# Altium PCB SensorNode.PcbDoc
Units mm, origin at the board's own origin, x right, y up, seen from the top; angles counter-clockwise.
Board outline 22.23 x 45.4 mm, 2 copper layers (Top Layer, Bottom Layer); 17 components, 15 nets, 98 pads, 6 vias.
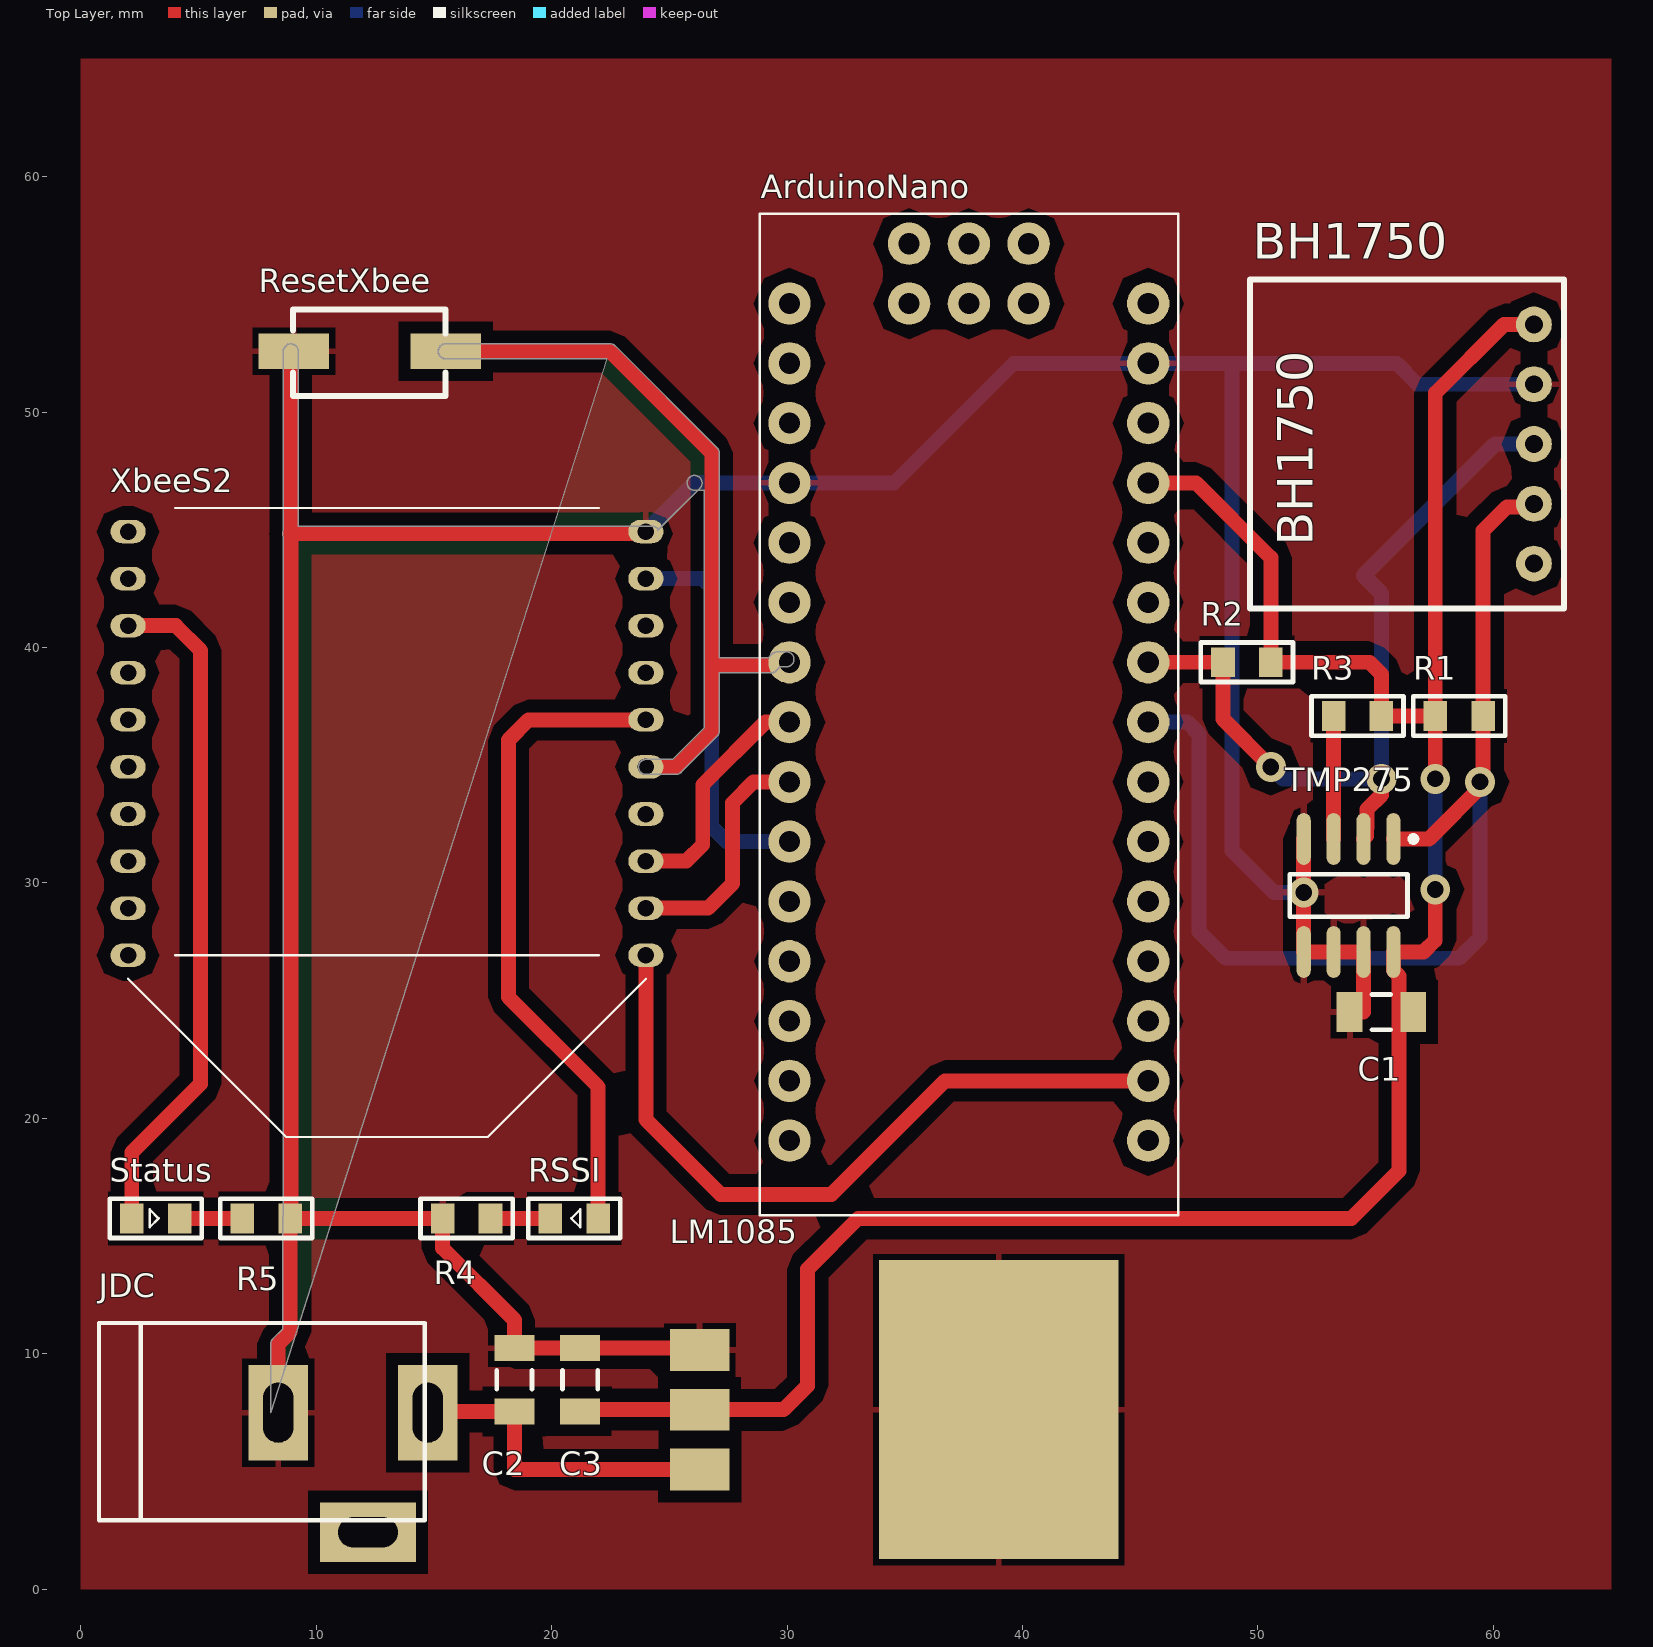
[diagram p0: Top Layer view]
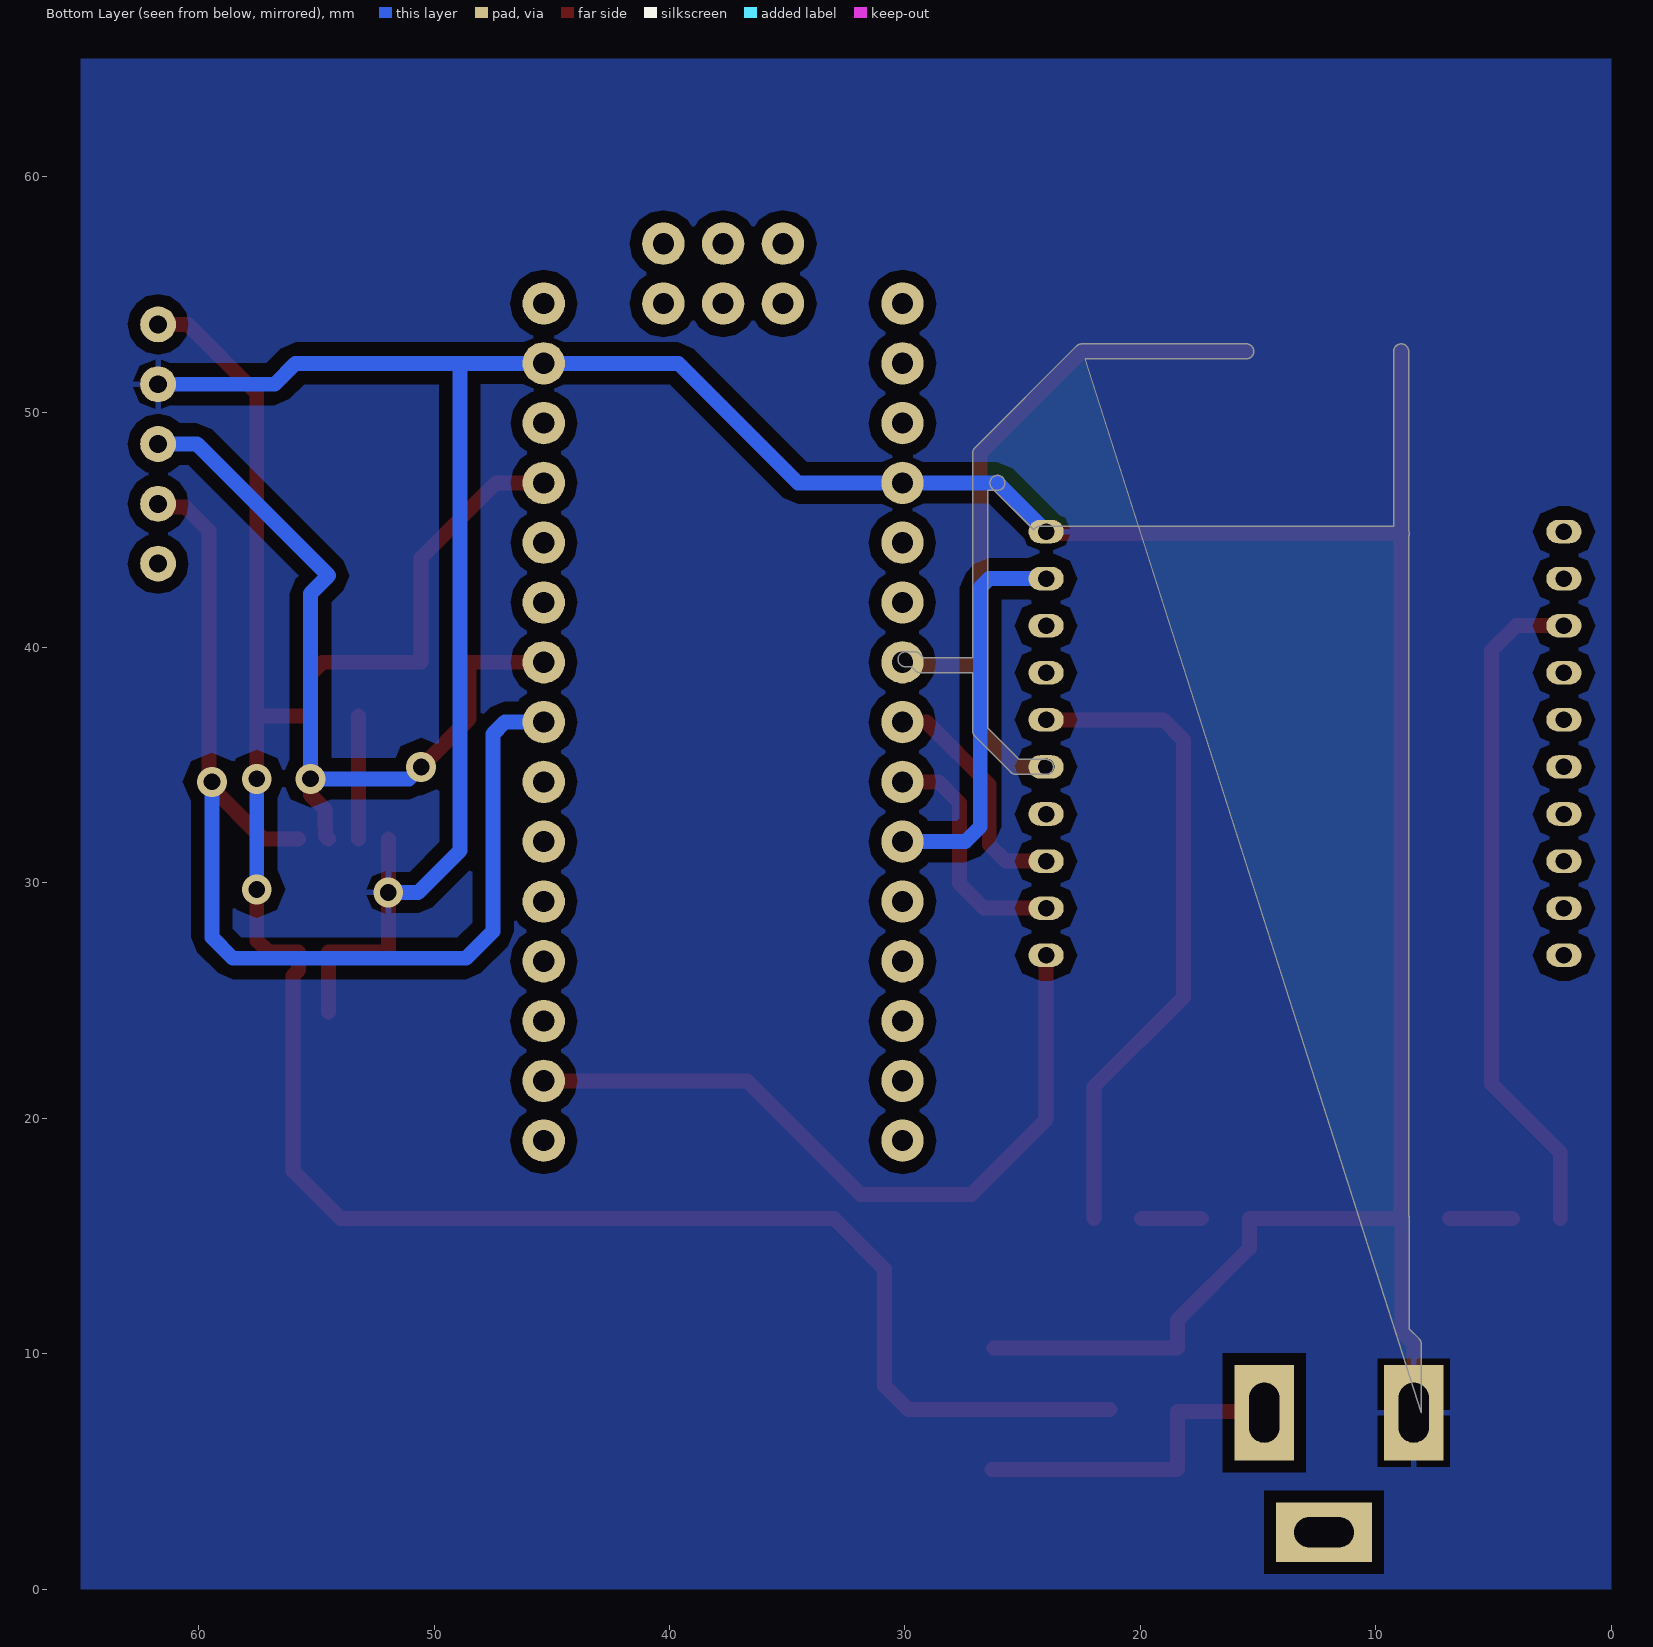
[diagram p1: Bottom Layer view, seen from below]

## Layer stack, top to bottom
Top Solder: solder mask 0.0102, Solder Resist, Dk 3.5
Top Layer: signal copper 0.0356
Dielectric 1: dielectric 0.32, FR-4, Dk 4.8
Bottom Layer: signal copper 0.0356
Bottom Solder: solder mask 0.0102, Solder Resist, Dk 3.5

## Board outline
8.064,7.493 8.064,10.414 cw(c8.382,10.414) 8.158,10.639 8.157,10.639 8.572,11.054 8.572,15.748 cw(c8.89,15.748) 8.6,15.878 cw(c8.917,15.902) 8.599,15.902 8.599,44.703 cw(c8.89,44.831) 8.599,44.959 8.599,52.578 cw(c8.917,52.578) 9.235,52.578 9.235,45.149 24.257,45.149 cw(c24.257,44.831) 24.527,44.999 26.294,46.765 ccw(c26.069,46.99) 26.387,46.99 ccw(c26.069,46.99) 26.069,47.308 ccw(c26.069,46.99) 25.844,47.214 ccw(c26.069,46.99) 26.069,46.672 26.479,46.672 26.479,36.581 25.14,35.242 24.003,35.242 ccw(c24.003,34.924) 24.003,34.606 25.272,34.606 ccw(c25.272,34.924) 25.497,34.7 25.497,34.699 27.022,36.224 27.021,36.224 ccw(c26.797,36.449) 27.115,36.449 27.115,38.925 29.337,38.925 ccw(c29.337,39.243) 29.562,39.019 29.562,39.018 29.723,39.179 29.972,39.179 ccw(c29.972,39.497) 30.29,39.497 ccw(c29.972,39.497) 29.972,39.815 29.591,39.815 ccw(c29.591,39.497) 29.366,39.721 29.366,39.722 29.205,39.561 27.115,39.561 27.115,48.26 ccw(c26.797,48.26) 27.021,48.485 27.022,48.485 22.704,52.803 22.704,52.802 ccw(c22.479,52.578) 22.479,52.896 15.494,52.896 ccw(c15.494,52.578) 15.494,52.26 22.347,52.26

## Design rules (kind name [scope] priority, off if disabled: settings)
Clearance [All] p1: gap=0.5
PolygonConnect [All] p1: connectstyle=Relief reliefconductorwidth=0.254 reliefentries=4 polygonreliefangle="90 Angle" airgapwidth=0.254
RoutingVias [All] p1: holewidth=0.711 width=1.27 viastyle="Through Hole" minholewidth=0.711 minwidth=1.27 maxholewidth=0.711 maxwidth=1.27
SolderMaskExpansion [All] p1: expansion=0.102
Width [All] p1: maxlimit=0.762 minlimit=0.508 preferedwidth=0.635
30 further rules are at their usual default settings.

## Components (designator, comment, footprint, x,y, rotation, side; value= is the part's Value field where it differs from the comment)
ArduinoNano "ArduinoNano" ArduinoNano 45.339,54.61 r180 top
BH1750 "BH1750" BH1750 61.722,43.561 r90 top
C1 "Cap Semi" C1206 55.245,24.511 r180 top
C2 "Cap Semi" C1206 18.415,8.89 r90 top
C3 "Cap Semi" C1206 21.209,8.89 r90 top
JDC "Jac DC" DC-IN 11.557,4.953 r0 top
LM1085 "LM1085" LM1085 26.289,7.62 r270 top
R1 "R" SMD0805R 58.547,37.084 r180 top
R2 "R" SMD0805R 49.53,39.37 r0 top
R3 "R" SMD0805R 54.229,37.084 r0 top
R4 "R" SMD0805R 16.383,15.748 r0 top
R5 "R" SMD0805R 7.874,15.748 r180 top
ResetXbee "SW" SW2 15.494,52.578 r180 top
RSSI "LED3" SMD0805LED 20.955,15.748 r180 top
Status "LED3" SMD0805LED 3.175,15.748 r0 top
TMP275 "TMP275" SO8_N 53.848,29.464 r270 top
XbeeS2 "XbeeS2" XbeeS2 24.003,26.924 r180 top

## Footprints (in the part's own frame and the unit in brackets; to place one, negate y for a bottom-side part, rotate by r counter-clockwise, add the part's x,y. Pads: shape width x height; smd on the part's side, far side on the other; paste and mask are expansions set on the pad)
ArduinoNano [mm]
  round 1.8 hole 0.9: 1(15.24,0) 2(15.24,2.54) 3(15.24,5.08) 4(15.24,7.62) 5(15.24,10.16) 6(15.24,12.7) 7(15.24,15.24) 8(15.24,17.78) 9(15.24,20.32) 10(15.24,22.86) 11(15.24,25.4) 12(15.24,27.94) 13(15.24,30.48) 14(15.24,33.02) 15(15.24,35.56) 16(0,35.56) 17(0,33.02) 18(0,30.48) 19(0,27.94) 20(0,25.4) 21(0,22.86) 22(0,20.32) 23(0,17.78) 24(0,15.24) 25(0,12.7) 26(0,10.16) 27(0,7.62) 28(0,5.08) 29(0,2.54) 30(0,0) 31(5.08,-2.54) 32(7.62,-2.54) 33(10.16,-2.54) 34(5.08,0) 35(7.62,0) 36(10.16,0)
  silkscreen extent -1.27,-3.81 16.51,38.73
BH1750 [mil]
  round 60 hole 30: 1(0,0) 2(100,0) 3(200,0) 4(300,0) 5(400,0)
  silkscreen extent -75,-50 475,475
C1206 [mm] "Chip Capacitor, Body 3.2x1.6mm, IPC High Density"
  rect 1.1x1.7 smd: 1(-1.35,0) 2(1.35,0)
  silkscreen extent -0.4,-0.75 0.4,0.75, body extent -1.7,-0.9 1.7,0.9, height 1.3
DC-IN [mil] "Jac DC input"
  rect 100x160 hole 50 slot 100 at 90 deg: 1(125,100) 2(-125,100)
  rect 160x100 hole 50 slot 100 at 0 deg: 3(25,-100)
  silkscreen extent -425,-80 120,250, body extent -410,-105 134,269, height 434
LM1085 [mil]
  rect 70x100 smd: GND(-100,0) INPUT(100,0) OUTPUT(0,0)
  rect 500x400 smd: GND1(0,500)
SMD0805LED [mm] "Chip LED, Body 2.0 x 1.3 mm (LxW typ)"
  rect 1x1.27 smd: 1(-1.016,0) 2(1.016,0)
  silkscreen extent -1.96,-0.84 1.96,0.84, body extent -1,-0.62 1,0.63, height 0.78
SMD0805R [mm] "Chip Resistor; Body 2.0 x 1.3 mm (LxW typ)"
  rect 1x1.27 smd: 1(-1.016,0) 2(1.016,0)
  silkscreen extent -1.96,-0.84 1.96,0.84, body extent -1,-0.62 1,0.63, height 0.78
SO8_N [mm] "8-Pin Small Outline Integrated Circuit 1.27 mm Pitch, IPC Medium Density"
  oval 2.2x0.6 smd: 1(-2.4,1.905) 2(-2.4,0.635) 3(-2.4,-0.635) 4(-2.4,-1.905) 5(2.4,-1.905) 6(2.4,-0.635) 7(2.4,0.635) 8(2.4,1.905)
  silkscreen extent -2.52,-2.5 0.9,2.88, body extent -1.95,-2.45 1.95,2.45, height 1.75
SW2 [mm]
  rect 3x1.5 smd: 1(0,0) 2(6.45,0)
  silkscreen extent 0,-1.78 6.48,1.91
XbeeS2 [mm]
  oval 1.5x1 hole 0.7: 1(0,0) 2(0,-2) 3(0,-4) 4(0,-6) 5(0,-8) 6(0,-10) 7(0,-12) 8(0,-14) 9(0,-16) 10(0,-18) 11(22,-18) 12(22,-16) 13(22,-14) 14(22,-12) 15(22,-10) 16(22,-8) 17(22,-6) 18(22,-4) 19(22,-2) 20(22,0)
  silkscreen extent 0,-19 22,7.72

## Part data
C1 C2 C3: "Capacitor (Semiconductor SIM Model)"
JDC: library part DCIN, "Jac DC input"
R1 R2 R3 R4 R5: "RES_08"
ResetXbee: library part SW2, "Switch button 2 pin"
RSSI Status: library part LEDSMD, "LED SMD"

## Via types
v1: diameter 1.27, hole 0.711, Top Layer to Bottom Layer, 6 vias

## Nets (pads, with @x,y where several pads share a name; then routed paths per layer and width w, separated by ;. In a path a pad name is that pad's centre, name@x,y a point inside that pad or via, vN(x,y) a via of type N, cw(c..) or ccw(c..) an arc to the next point about the centre after c; other vN are vias at no path point)
3V3: ArduinoNano.17 XbeeS2.1 | length 31.6
  Top Layer w0.635: XbeeS2.1 24.003,19.939 27.178,16.764 31.877,16.764 36.703,21.59 ArduinoNano.17
5V: ArduinoNano.27 BH1750.5 C1.1 C3.1 LM1085.OUTPUT R1.2 R2.2 R3.2 TMP275.8 | length 101.5
  Top Layer w0.635: C3.1@21.289,7.62 LM1085.OUTPUT 29.845,7.62 30.861,8.636 30.861,13.589 33.02,15.748 53.975,15.748 55.995,17.768 55.995,26.047 55.753,26.289 TMP275.8 57.036,27.064 57.531,27.559 v1(57.531,29.718) ; ArduinoNano.27 47.371,46.99 50.546,43.815 R2.2 54.737,39.37 55.245,38.862 R3.2 R1.2 ; v1@57.531,34.671 R1.2 ; BH1750.5 60.452,53.721 57.531,50.8 R1.2
  Bottom Layer w0.635: v1(57.531,29.718) v1(57.531,34.417)
GND: ArduinoNano.4 ArduinoNano.29 BH1750.4 C1.2 C2.2 C3.2 JDC.2 LM1085.GND LM1085.GND1 R4.1 R5.1 ResetXbee.2 TMP275.4 TMP275.5 TMP275.6 TMP275.7 XbeeS2.10 | length 157
  Top Layer w0.635: JDC.2 8.382,10.414 8.89,10.922 R5.1 R4.1 15.367,14.478 18.415,11.43 C2.2 C3.2 LM1085.GND@26.209,10.24 ; 8.89,44.831 XbeeS2.10@24.257,44.831 ; R5.1@8.917,15.902 ResetXbee.2@8.917,52.578 ; TMP275.4 TMP275.5 TMP275.6 TMP275.7 54.483,24.523
  Bottom Layer w0.635: XbeeS2.10 26.069,46.99 ArduinoNano.4 34.544,46.99 39.624,52.07 ArduinoNano.29 55.88,52.07 56.769,51.181 BH1750.4 ; 48.895,52.07 48.895,31.369 50.673,29.591 v1(51.943,29.591)
NetArduinoNano_7: ArduinoNano.7 ResetXbee.1 XbeeS2.5 | length 31.6
  Top Layer w0.635: ResetXbee.1 22.479,52.578 26.797,48.26 26.797,36.449 25.272,34.924 XbeeS2.5 ; 26.797,39.243 29.337,39.243 29.591,39.497 ArduinoNano.7@29.972,39.497
NetArduinoNano_8: ArduinoNano.8 XbeeS2.3 | length 10
  Top Layer w0.635: XbeeS2.3 25.717,30.924 26.416,31.623 26.416,34.163 29.083,36.83 ArduinoNano.8
NetArduinoNano_9: ArduinoNano.9 XbeeS2.2 | length 10.3
  Top Layer w0.635: XbeeS2.2 26.638,28.924 27.686,29.972 27.686,33.401 28.575,34.29 ArduinoNano.9
NetArduinoNano_10: ArduinoNano.10 XbeeS2.9 | length 16.7
  Bottom Layer w0.635: XbeeS2.9 26.418,42.924 26.797,42.545 26.797,32.385 27.432,31.75 ArduinoNano.10
NetArduinoNano_23: ArduinoNano.23 BH1750.2 R1.1 TMP275.1 | length 48.3
  Top Layer w0.635: TMP275.1 57.264,31.864 59.563,34.163 R1.1 59.563,44.958 60.579,45.974 BH1750.2@61.722,45.974
  Bottom Layer w0.635: ArduinoNano.23 46.99,36.83 47.498,36.322 47.498,27.94 48.641,26.797 58.547,26.797 59.436,27.686 v1(59.436,34.29)
NetArduinoNano_24: ArduinoNano.24 BH1750.3 R2.1 TMP275.2 | length 34.7
  Top Layer w0.635: ArduinoNano.24 R2.1 48.514,36.957 v1(50.546,34.925) ; TMP275.2 54.618,31.999 54.618,32.334 54.636,32.352 54.636,33.127 55.245,33.736 v1(55.245,34.417)
  Bottom Layer w0.635: v1(50.546,34.925) 51.054,34.417 v1(55.245,34.417) 55.245,42.291 54.483,43.053 60.071,48.641 BH1750.3
NetR3_1: R3.1 TMP275.3 | length 5.2
  Top Layer w0.635: TMP275.3 R3.1
NetR4_2: R4.2 RSSI.2 | length 2.5
  Top Layer w0.635: R4.2 RSSI.2
NetR5_2: R5.2 Status.2 | length 2.7
  Top Layer w0.635: Status.2 R5.2
NetRSSI_1: RSSI.1 XbeeS2.6 | length 28.1
  Top Layer w0.635: RSSI.1 21.971,21.336 18.161,25.146 18.161,36.068 19.017,36.924 XbeeS2.6
NetStatus_1: Status.1 XbeeS2.13 | length 28.9
  Top Layer w0.635: XbeeS2.13 4.034,40.924 5.08,39.878 5.08,21.463 2.159,18.542 Status.1
VCC: C2.1 JDC.1 LM1085.INPUT | length 14
  Top Layer w0.635: JDC.1 14.779,7.54 C2.1 18.415,5.08 LM1085.INPUT
pads on no net: ArduinoNano.1 ArduinoNano.2 ArduinoNano.3 ArduinoNano.5 ArduinoNano.6 ArduinoNano.11 ArduinoNano.12 ArduinoNano.13 ArduinoNano.14 ArduinoNano.15 ArduinoNano.16 ArduinoNano.18 ArduinoNano.19 ArduinoNano.20 ArduinoNano.21 ArduinoNano.22 ArduinoNano.25 ArduinoNano.26 ArduinoNano.28 ArduinoNano.30 ArduinoNano.31 ArduinoNano.32 ArduinoNano.33 ArduinoNano.34 ArduinoNano.35 ArduinoNano.36 BH1750.1 JDC.3 XbeeS2.4 XbeeS2.7 XbeeS2.8 XbeeS2.11 XbeeS2.12 XbeeS2.14 XbeeS2.15 XbeeS2.16 XbeeS2.17 XbeeS2.18 XbeeS2.19 XbeeS2.20

## Polygon pours and split planes (outlines as drawn)
GND on Bottom Layer "Bottom Layer-No Net" (solid, pour order 0): 0,0 0,65 65,65 65,0
GND on Top Layer "Bottom Layer-No Net" (solid, pour order 2): 0,0 65,0 65,65 0,65